# Altium PCB KP_Fedorov_SM5-71B — копия.PcbDoc
Units mm, origin at the board's own origin, x right, y up, seen from the top; angles counter-clockwise.
Board outline 50 x 50 mm, 2 copper layers (Top Layer, Bottom Layer), stack 1.56 mm thick; 70 components, 40 nets, 255 pads, 69 vias.
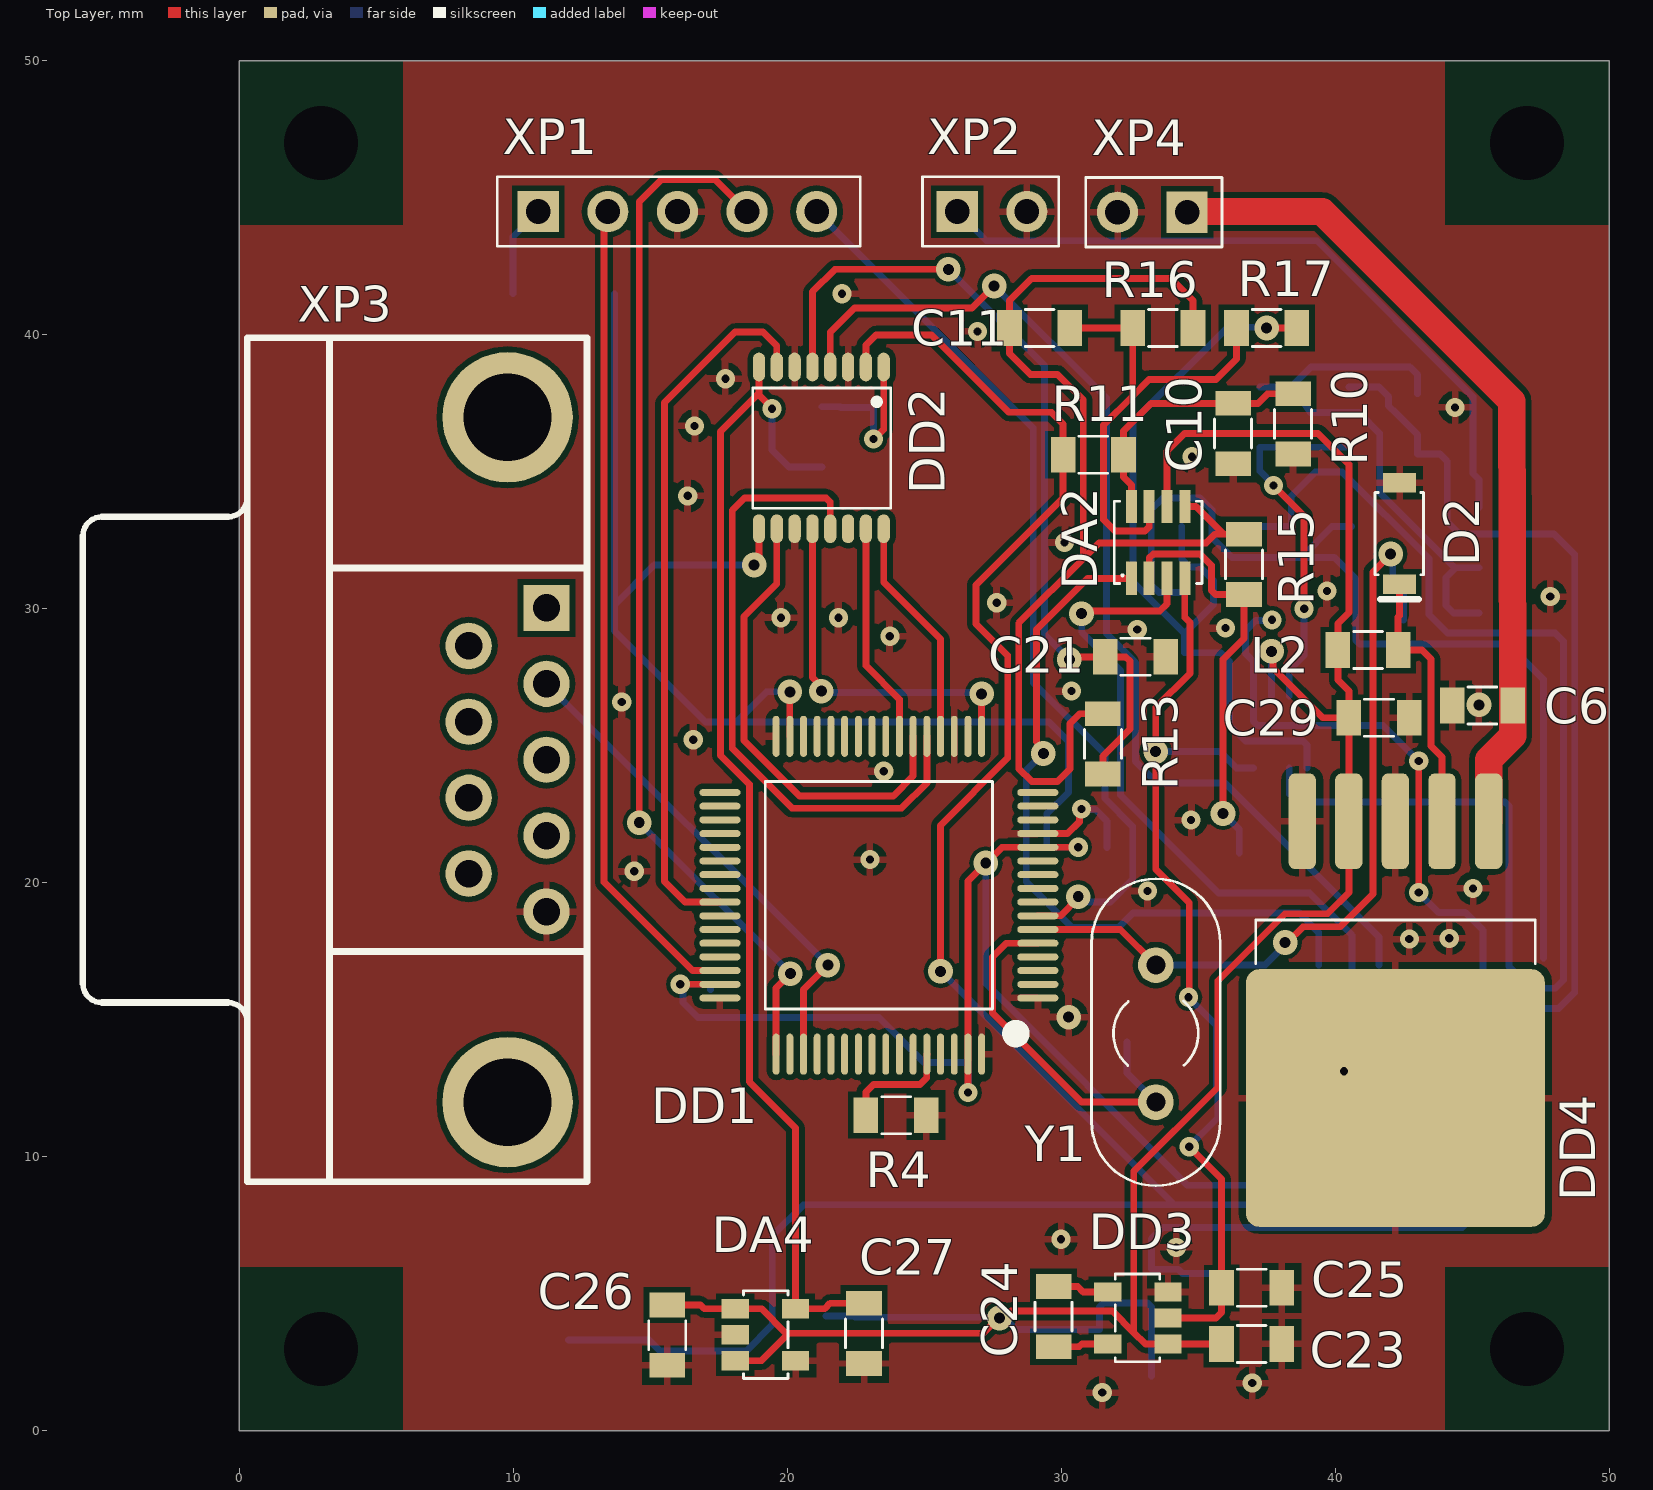
[diagram p0: Top Layer view]
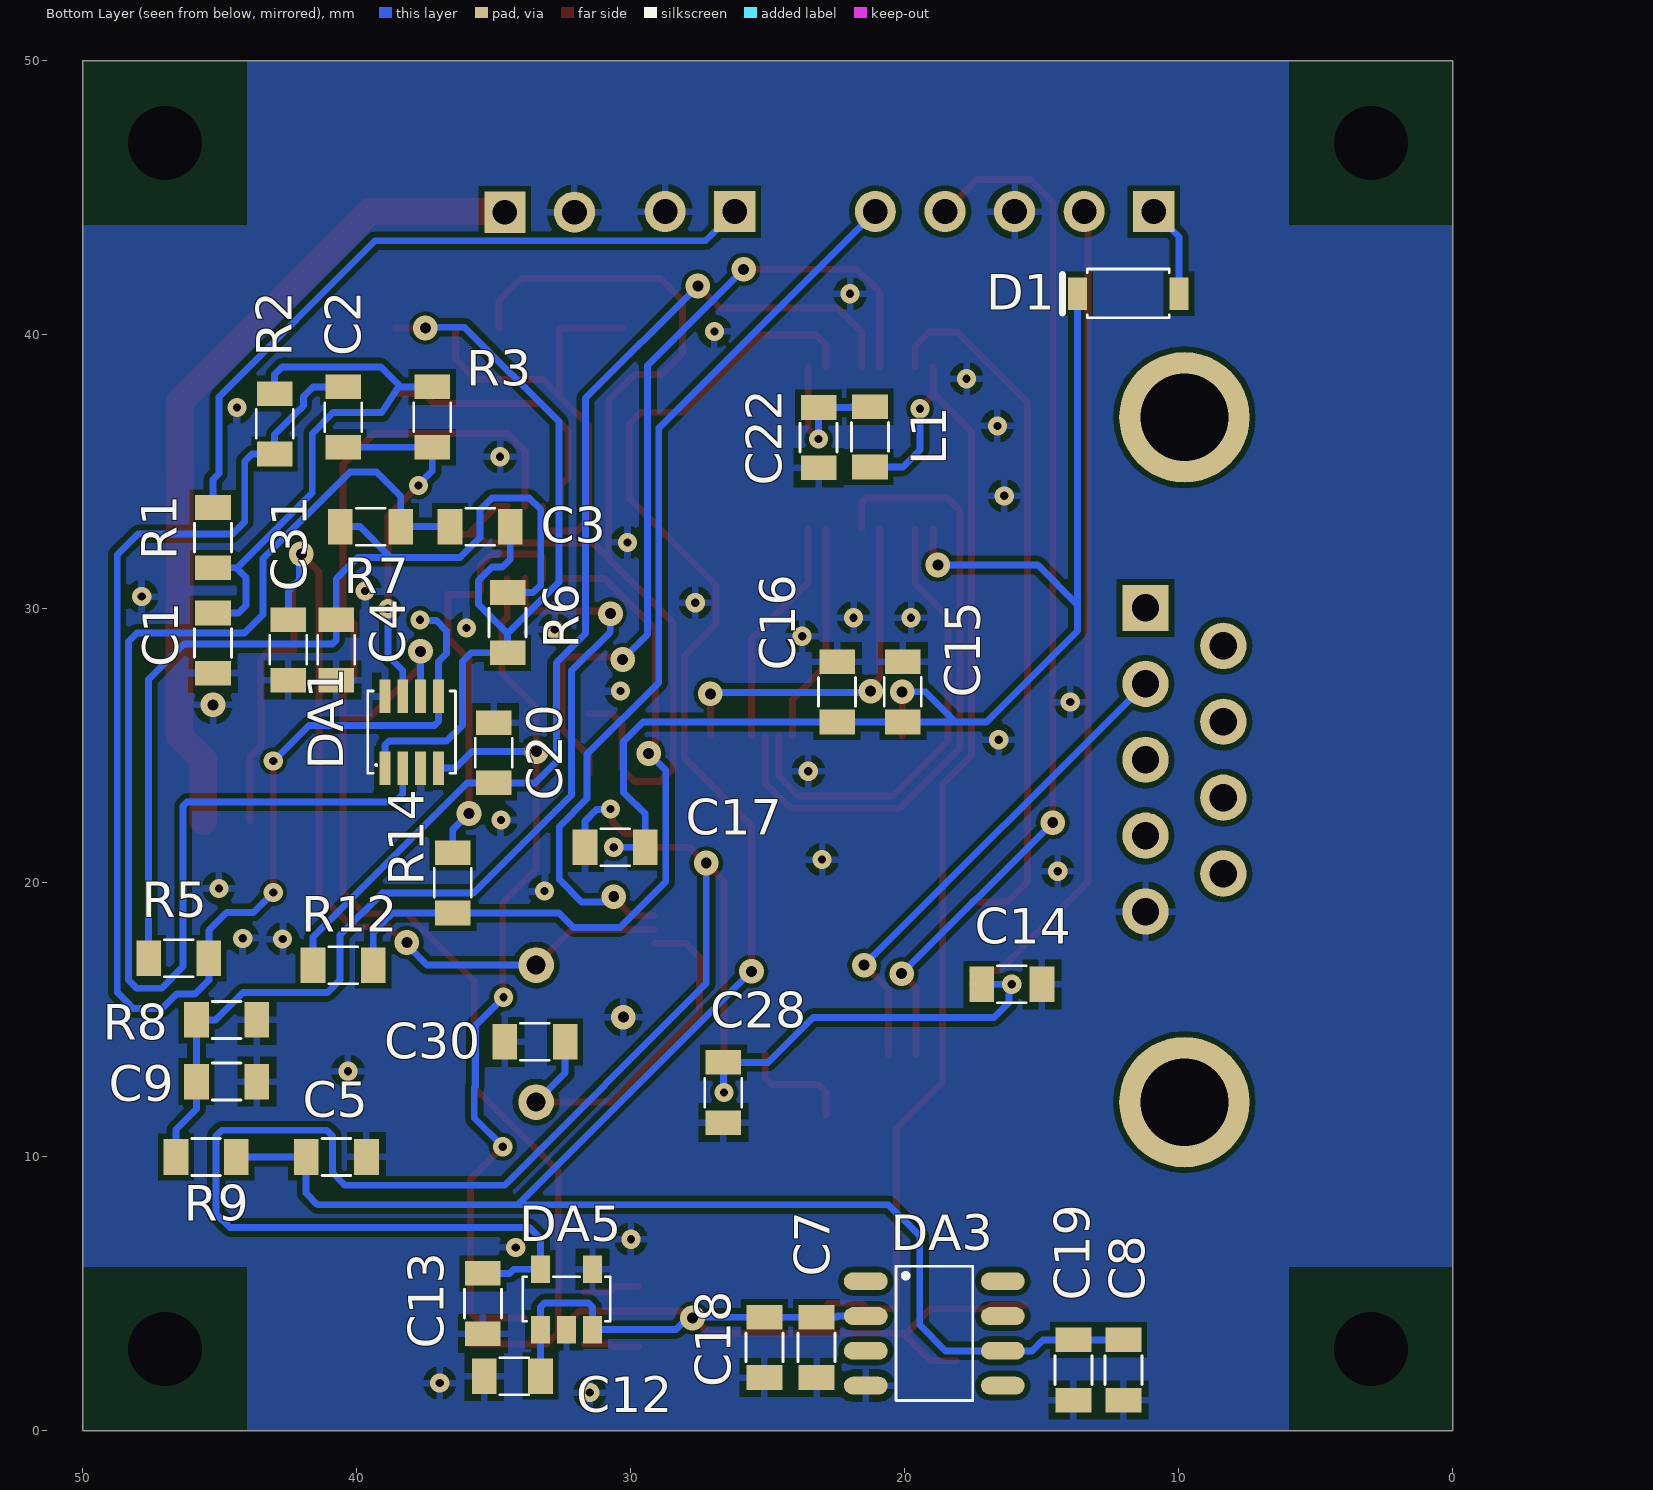
[diagram p1: Bottom Layer view, seen from below]

## Layer stack, top to bottom
Top Solder: solder mask 0.01, Solder Resist, Dk 3.5
Top Layer: signal copper 0.03
Dielectric 1: dielectric 1.5, FR-4, Dk 4.8
Bottom Layer: signal copper 0.03
Bottom Solder: solder mask 0.01, Solder Resist, Dk 3.5

## Board outline
0,0 50,0 50,50 0,50

## Design rules (kind name [scope] priority, off if disabled: settings)
AcuteAngle [All] p1: minimum=4.50000000000000E+0001 checktracksonly=FALSE
Clearance Clearance_KeepOutLayer [OnLayer('Keep-Out Layer')] p1: gap=0 ignorepadtopadclearanceinfootprint=FALSE
Clearance [All] p2: gap=0.15 ignorepadtopadclearanceinfootprint=FALSE except(0.2: Track-Fill Track-Poly Track-Region SMDPad-Fill SMDPad-Poly SMDPad-Region THPad-Fill THPad-Poly THPad-Region Fill-Fill Fill-Poly Fill-Region Poly-Poly Poly-Region Region-Region)
ComponentClearance [All] p1: gap=0.2 collisioncheckmode=3 verticalgap=0.2 showdistances=FALSE
DiffPairsRouting DiffPairsRouting_USB [InDifferentialPair('USB0') or InDifferentialPair('USB1')] p1: maxlimit=0.254 minlimit=0.15 mostfreqgap=0.15 toplayer_minwidth=0.15 toplayer_maxwidth=0.15 toplayer_prefwidth=0.15 bottomlayer_minwidth=0.15 bottomlayer_maxwidth=0.15 bottomlayer_prefwidth=0.15 maxuncoupledlength=12.7
HoleSize [All] p1: absolutevalues=TRUE maxlimit=3.2 minlimit=0.3 maxpercent=80.000 minpercent=20.000
HoleToHoleClearance [All] p1: gap=0.3 allowstackedmicrovias=TRUE
MatchedLengths [InDifferentialPair('USB0') or InDifferentialPair('USB1')] p1: tolerance=1.905 checknetsindiffpair=TRUE checkdiffpairvsdiffpair=FALSE checkxsignals=FALSE checkothers=FALSE
MinimumAnnularRing [All] p1: minimumring=0.2
MinimumSolderMaskSliver [All] p1: minsoldermaskwidth=0.1
PolygonConnect PolygonConnect_Via [IsVia] p1: thpad.connectstyle=Direct thpad.reliefconductorwidth=0.254 thpad.reliefentries=4 thpad.polygonreliefangle="90 Angle" thpad.airgapwidth=0.254 smdpad.connectstyle=Relief smdpad.reliefconductorwidth=0.254 smdpad.reliefentries=4 smdpad.polygonreliefangle="90 Angle" smdpad.airgapwidth=0.254 via.connectstyle=Relief via.reliefconductorwidth=0.254 via.reliefentries=4 via.polygonreliefangle="90 Angle" via.airgapwidth=0.254
PolygonConnect [All] p2: connectstyle=Relief reliefconductorwidth=0.254 reliefentries=4 polygonreliefangle="90 Angle" airgapwidth=0.254
RoutingVias [All] p1: holewidth=0.4 width=0.9 viastyle="Through Hole" minholewidth=0.3 minwidth=0.7 maxholewidth=0.5 maxwidth=1.1
SMDEntry [All] p1: side=TRUE corner=TRUE anyangle=FALSE
SMDNeckDown [All] p1: percent=100.000
SMDToCorner [All] p1: distance=0
SMDToPlane [All] p1: distance=0
SilkToSilkClearance [All] p1: silktosilkclearance=0
SilkToSolderMaskClearance [IsPad] p1: minsilkscreentomaskgap=0 clearancetoexposedcopper=FALSE
SolderMaskExpansion [All] p1: expansion=0.05 istentingtop=FALSE
Width [All] p1: maxlimit=5 minlimit=0.15 preferedwidth=0.254 minimp=50.000000 maximp=50.000000 favimp=50.000000
23 further rules are at their usual default settings.

## Classes and differential pairs
component class KP_Fedorov_SM5-71B: C1 C2 C3 C4 C5 C6 C7 C8 C9 C10 C11 C12 C13 C14 C15 C16 C17 C18 C19 C20 C21 C22 C23 C24 C25 C26 C27 C28 C29 C30 C31 D1 D2 DA1 DA2 DA3 DA4 DA5 DD1 DD2 DD3 DD4 L1 L2 R1 R2 R3 R4 R5 R6 R7 R8 R9 R10 R11 R12 R13 R14 R15 R16 R17 XP1 XP2 XP3 XP4 Y1

## Components (designator, comment, footprint, x,y, rotation, side; value= is the part's Value field where it differs from the comment)
C1 "24nF" "0805 Capicator"#1 45.25,28.75 r270 bottom value=24n
C2 "10nF" "0805 Capicator"#1 40.5,37 r90 bottom value=10n
C3 "10n" "0805 Capicator"#1 35.5,33 r180 bottom
C4 "150n" "0805 Capicator"#1 40.75,28.5 r90 bottom
C5 "100 uF" "0805 Capicator"#1 40.75,10 r180 bottom
C6 "100 uF" "0805 Capicator"#1 45.375,26.475 r180 top
C7 "100 uF" "0805 Capicator"#1 23.225,3.05 r270 bottom
C8 "100 uF" "0805 Capicator"#1 12.025,2.225 r90 bottom
C9 "0.1 nF" "0805 Capicator"#1 44.75,12.75 r0 bottom
C10 "0.1 nF" "0805 Capicator"#1 36.275,36.4 r90 top
C11 "0.1 nF" "0805 Capicator"#1 29.214,40.25 r180 top
C12 "0.1 uF" "0805 Capicator"#2 34.25,2 r0 bottom
C13 "0.1 uF" "0805 Capicator"#1 35.4,4.65 r270 bottom
C14 "0.1uF" "0805 Capicator"#1 16.1,16.3 r180 bottom
C15 "0.1uF" "0805 Capicator"#1 20.075,26.975 r90 bottom
C16 "0.1uF" "0805 Capicator"#1 22.475,26.975 r90 bottom
C17 "0.1uF" "0805 Capicator"#1 30.575,21.3 r0 bottom
C18 "0.1 uF" "0805 Capicator"#1 25.125,3.05 r270 bottom
C19 "0.1 uF" "0805 Capicator"#1 13.85,2.225 r90 bottom
C20 "2.2 nF" "0805 Capicator"#1 35,24.75 r270 bottom
C21 "2.2 nF" "0805 Capicator"#1 32.714,28.25 r0 top
C22 "1 uF" "0805 Capicator"#1 23.15,36.25 r90 bottom
C23 "1 uF" "0805 Capicator"#1 36.95,3.175 r0 top
C24 "1 uF" "0805 Capicator"#1 29.725,4.175 r90 top
C25 "1 uF" "0805 Capicator"#1 36.95,5.225 r0 top
C26 "4.7 uF" "0805 Capicator"#1 15.625,3.5 r270 top
C27 "4.7 uF" "0805 Capicator"#1 22.808,3.563 r270 top
C28 "4.7uF" "0805 Capicator"#1 26.625,12.35 r270 bottom
C29 "330 uF" "0805 Capicator"#1 41.6,26.025 r0 top
C30 "10 pF" "0805 Capicator"#1 33.5,14.2 r0 bottom
C31 "10 pF" "0805 Capicator"#1 42.5,28.5 r270 bottom
D1 "MBR0520LT1G" sod-123 10,41.5 r0 bottom
D2 "MBR0520LT1G" sod-123 42.35,34.6 r270 top
DA1 "AD8502" SOT-23-8#1 38,25.5 r180 bottom
DA2 "AD8502" SOT-23-8#2 33.539,32.425 r0 top
DA3 "LDO" SOIC-8 21.425,5.465 r180 bottom
DA4 "LDO2.5V" SOT-23-5 18.108,3.513 r270 top
DA5 "LDO3.3V" SOT-23-5 32.35,3.7 r180 bottom
DD1 "STM32F303RCT7" LQFP64 23.35,19.55 r180 top
DD2 "24bit 128k" TSSOP-16 23.525,38.825 r270 top
DD3 "DC/DC inv" SOT-23-5 33.9,4.125 r90 top
DD4 "DC/DC" TO-263-5L 42.2,22.25 r180 top
L1 "10 uH" "0805 Inductor" 21.275,36.275 r90 bottom
L2 "330 uH" "0805 Inductor" 41.2,28.5 r180 top
R1 "6.8k" "0805 Resistor" 45.25,32.6 r270 bottom
R2 "6.8k" "0805 Resistor" 43,36.75 r270 bottom
R3 "3.9k" "0805 Resistor" 37.25,37 r270 bottom
R4 "3.9k" "0805 Resistor" 23.975,11.525 r0 top
R5 "2.2k" "0805 Resistor" 46.5,17.25 r180 bottom
R6 "2.2k" "0805 Resistor" 34.5,29.5 r270 bottom
R7 "1.8k" "0805 Resistor" 39.5,33 r0 bottom
R8 "10k" "0805 Resistor" 44.75,15 r0 bottom
R9 "10k" "0805 Resistor" 45.5,10 r180 bottom
R10 "10k" "0805 Resistor" 38.464,36.75 r90 top
R11 "20k" "0805 Resistor" 31.175,35.625 r180 top
R12 "15k" "0805 Resistor" 40.5,17 r0 bottom
R13 "15k" "0805 Resistor" 31.525,25.075 r270 top
R14 "1k" "0805 Resistor" 36.5,20 r270 bottom
R15 "1k" "0805 Resistor" 36.675,31.625 r90 top
R16 "1k" "0805 Resistor" 33.714,40.25 r0 top
R17 "2k" "0805 Resistor" 37.5,40.25 r180 top
XP1 "PLS-5" "PBS 5x1" 10.92,44.5 r0 top
XP2 "PBS2" "PBS 2x1" 26.21,44.5 r0 top
XP3 "SCNM9FM2MBK" DB9 9.8,12 r90 top
XP4 "PBS2" "PBS 2x1" 34.6,44.475 r180 top
Y1 "8MHz" R38 33.458,14.5 r180 top
ZBOAS115392228 "Comment" "BOASVIEWdrill:Таблица отверстий:0:0:0:0" 3.9,2317.2 r0 top
ZBOAS298494460 "Слой 1" "BOASVIEWlayer:Top Layer:2:1:1:1" 50.4,2373.9 r0 top (schematic designator fewf)
ZBOAS883498437 "Comment" "BOASVIEWside:Вид платы слева:2:0:0:0" 199,2474.9 r0 top
ZBOAS1067394492 "Слой 2" "BOASVIEWlayer:Bottom Layer:2:-2:32:1" 245.7,2374.7 r180 top (schematic designator fewf)

## Footprints (in the part's own frame and the unit in brackets; to place one, negate y for a bottom-side part, rotate by r counter-clockwise, add the part's x,y. Pads: shape width x height; smd on the part's side, far side on the other; paste and mask are expansions set on the pad)
"0805 Capicator"#1 [mm]
  rect 0.9x1.3 smd: 1(-1.1,0) 2(1.1,0)
  silkscreen extent -0.53,-0.67 0.53,0.67, body extent -1.05,-0.67 1.05,0.68, height 0.75
"0805 Capicator"#2 [mm]
  rect 0.9x1.3 smd: 1(-0.95,0) 2(1.1,0)
  silkscreen extent -0.53,-0.67 0.52,0.67, body extent -1.05,-0.67 1.05,0.68, height 0.75
"0805 Inductor" [mm]
  rect 0.9x1.3 smd: 1(-1.1,0) 2(1.1,0)
  silkscreen extent -0.53,-0.67 0.52,0.67, body extent -1.05,-0.67 1.05,0.68, height 0.75
"0805 Resistor" [mm]
  rect 0.9x1.3 smd: 1(-1.1,0) 2(1.1,0)
  silkscreen extent -0.53,-0.67 0.52,0.67, body extent -1.05,-0.67 1.05,0.68, height 0.6
"BOASVIEWdrill:Таблица отверстий:0:0:0:0" [mm]
"BOASVIEWlayer:Bottom Layer:2:-2:32:1" [mm]
"BOASVIEWlayer:Top Layer:2:1:1:1" [mm]
"BOASVIEWside:Вид платы слева:2:0:0:0" [mm]
DB9 [mm]
  rect 1.69x1.69 hole 1: 1(18.035,-1.42)
  round 1.69 hole 1: 2(15.265,-1.42) 3(12.495,-1.42) 4(9.725,-1.42) 5(6.955,-1.42) 6(16.65,1.42) 7(13.88,1.42) 8(11.11,1.42) 9(8.34,1.42)
  round 4.76 hole 3.2: A(0,0) A(24.99,0)
  silkscreen extent -2.91,-2.9 27.9,15.5, body extent -2.97,-2.85 27.92,15.55, height 12.53
LQFP64 [mm]
  oval 1.5x0.254 smd paste+0 mask+0.02: 1(-5.8,3.75) 2(-5.8,3.25) 3(-5.8,2.75) 4(-5.8,2.25) 5(-5.8,1.75) 6(-5.8,1.25) 7(-5.8,0.75) 8(-5.8,0.25) 9(-5.8,-0.25) 10(-5.8,-0.75) 11(-5.8,-1.25) 12(-5.8,-1.75) 13(-5.8,-2.25) 14(-5.8,-2.75) 15(-5.8,-3.25) 16(-5.8,-3.75) 33(5.8,-3.75) 34(5.8,-3.25) 35(5.8,-2.75) 36(5.8,-2.25) 37(5.8,-1.75) 38(5.8,-1.25) 39(5.8,-0.75) 40(5.8,-0.25) 41(5.8,0.25) 42(5.8,0.75) 43(5.8,1.25) 44(5.8,1.75) 45(5.8,2.25) 46(5.8,2.75) 47(5.8,3.25) 48(5.8,3.75)
  oval 0.254x1.5 smd paste+0 mask+0.02: 17(-3.75,-5.8) 18(-3.25,-5.8) 19(-2.75,-5.8) 20(-2.25,-5.8) 21(-1.75,-5.8) 22(-1.25,-5.8) 23(-0.75,-5.8) 24(-0.25,-5.8) 25(0.25,-5.8) 26(0.75,-5.8) 27(1.25,-5.8) 28(1.75,-5.8) 29(2.25,-5.8) 30(2.75,-5.8) 31(3.25,-5.8) 32(3.75,-5.8) 49(3.75,5.8) 50(3.25,5.8) 51(2.75,5.8) 52(2.25,5.8) 53(1.75,5.8) 54(1.25,5.8) 55(0.75,5.8) 56(0.25,5.8) 57(-0.25,5.8) 58(-0.75,5.8) 59(-1.25,5.8) 60(-1.75,5.8) 61(-2.25,5.8) 62(-2.75,5.8) 63(-3.25,5.8) 64(-3.75,5.8)
  silkscreen extent -5.2,-4.15 4.15,5.25, body extent -6,-6.02 6,5.98, height 1.56
"PBS 2x1" [mm] "Connector; Header; 5 Position"
  rect 1.5x1.5 hole 0.9: 1(0,0)
  round 1.5 hole 0.9: 2(2.54,0)
  silkscreen extent -1.27,-1.27 3.7,1.27, body extent -1.34,-1.24 3.74,1.3, height 8.52
"PBS 5x1" [mm] "Connector; Header; 5 Position"
  rect 1.5x1.5 hole 0.9: 1(0,0)
  round 1.5 hole 0.9: 2(2.54,0) 3(5.08,0) 4(7.62,0) 5(10.16,0)
  silkscreen extent -1.5,-1.27 11.75,1.27, body extent -1.52,-1.25 11.68,1.25, height 8.5
R38 [mm] "Crystal"
  round 1.3 hole 0.7: 1(0,2.5) 2(0,-2.5)
  silkscreen extent -2.35,-5.65 2.35,5.55, body extent -2.26,-5.56 2.24,5.44, height 4
sod-123 [mm]
  rect 0.7x1.2 smd: 1(0,0) 2(3.7,0)
  silkscreen extent 0.35,-0.9 4.25,0.87, body extent 0,-0.8 3.7,0.8
SOIC-8 [mm]
  oval 1.6x0.65 smd: 1(0,0) 2(0,-1.27) 3(0,-2.54) 4(0,-3.81) 5(5,-3.81) 6(5,-2.54) 7(5,-1.27) 8(5,0)
  silkscreen extent 1.1,-4.35 3.9,0.55, body extent -0.36,-4.35 5.41,0.55, height 1.45
SOT-23-5 [mm]
  rect 0.7x1 smd mask+0.045: 1(-0.95,0) 2(0,0) 3(0.95,0) 4(0.95,2.2) 5(-0.95,2.2)
  silkscreen extent -1.6,0.3 1.6,1.92, body extent -1.5,-0.15 1.5,2.35, height 1.1
SOT-23-8#1 [mm]
  rect 0.4x1.22 smd: 1(-0.975,-1.31) 2(-0.325,-1.31) 3(0.325,-1.31) 4(0.975,-1.31) 5(-0.975,1.31) 6(-0.325,1.31) 7(0.975,1.31) 8(0.325,1.31)
  silkscreen extent -1.6,-1.5 1.6,1.5, body extent -1.5,-1.42 1.5,1.42, height 1.2
SOT-23-8#2 [mm]
  rect 0.4x1.22 smd mask+0.045: 1(-0.975,-1.31) 2(-0.325,-1.31) 3(0.325,-1.31) 4(0.975,-1.31) 5(-0.975,1.31) 6(-0.325,1.31) 7(0.975,1.31) 8(0.325,1.31)
  silkscreen extent -1.6,-1.5 1.6,1.5, body extent -1.5,-1.42 1.5,1.42, height 1.2
TO-263-5L [mm]
  rrect50% 1x3.5 smd: 1(-3.4,0) 2(-1.7,0) 3(0,0) 4(1.7,0) 5(3.4,0)
  rrect10% 10.9x9.4 smd: 3(0,10.1)
  silkscreen extent -5.1,3.6 5.1,5.2, body extent -5,-1.29 5,14.38, height 4.83
TSSOP-16 [mm]
  oval 1.05x0.45 smd paste+0 mask+0.1: 1(0,0) 2(0,-0.65) 3(0,-1.3) 4(0,-1.95) 5(0,-2.6) 6(0,-3.25) 7(0,-3.9) 8(0,-4.55) 9(5.9,-4.55) 10(5.9,-3.9) 11(5.9,-3.25) 12(5.9,-2.6) 13(5.9,-1.95) 14(5.9,-1.3) 15(5.9,-0.65) 16(5.9,0)
  silkscreen extent 0.76,-4.78 5.16,0.25, body extent -0.25,-4.78 6.15,0.23

## Part data
C1 C2 C3 C4 C5 C6 C7 C8 C9 C10 C11 C12 C13 C14 C15 C16 C17 C18 C19 C20 C21 C22 C23 C24 C25 C26 C27 C28 C29 C30 C31: library part Capacitor, ValueType=Конденсатор
D1 D2: library part "Diode Schottky", link=https://www.chipdip.ru/product/mbr0520lt1
DA1 DA2: library part OpAmp, ref=chipdip.ru/product/ad8502arjz-reel7
DA3: "ADR445BRZ"
DA4: "ADM7160AUJZ"
DA5: "TPS78233DDCR"
DD1: "ARM Cortex-M4 32-bit MCU, 256 KB Flash, 40 KB Internal RAM, 52 I/Os, 64-pin LQFP, -40 to 105 degC, Tray, 39x12bit ADC", Manufacturer=STMicroelectronics, ComponentLink2Description=Datasheet, ComponentLink2URL=http://www.st.com/st-web-ui/static/active/en/resource/technical/document/datasheet/DM00058181.pdf, ComponentLink3Description=ChipDip, ComponentLink3URL=https://www.chipdip.ru/product1/8001934304?from=suggest_product, Part Number=STM32F303RCT7, Type=IC
DD2: library part ADC, "AD7767"
DD3: "TPS60403DBVR"
DD4: "LM2575S-5.0/NOPB"
L1 L2: library part Inductor, ValueType=Индуктивность
R1 R2 R3 R4 R5 R6 R7 R8 R9 R10 R11 R12 R13 R14 R15 R16 R17: library part Resistor, ValueType=Резистор
XP1: library part Conn5x1, Manufacturer=Amass, ComponentLink1URL=chipdip.ru/product/pls-5, Part Number=PLS-5, Type=Connector
XP2 XP4: library part Conn2x1, Type=Connector
XP3: library part Conn9x1, "DB-9M", Manufacturer=Amass, Part Number=XT30PW, ComponentLink1Description=AliExpress, ComponentLink1URL=https://www.chipdip.ru/product/scnm9fm2mbk, Type=Connector
Y1: library part "Crystal 8MHz", "Crystal. HC-49S (US)", Manufacturer=China, Part Number=8.000MHzHC-49US, ComponentLink1Description=Chip&Dip, ComponentLink1URL=https://www.chipdip.ru/product/8mhz-hc-49s, Type=Crystal

## Free pads (board coordinates)
  round 0 hole 2.7 unplated mask+1: 0(3,3) 0(3,47) 0(47,3) 0(47,47)

## Via types
v1: diameter 0.7, hole 0.3, Top Layer to Bottom Layer, 45 vias
v2: diameter 0.9, hole 0.4, Top Layer to Bottom Layer, 24 vias

## Nets (pads, with @x,y where several pads share a name; then routed paths per layer and width w, separated by ;. In a path a pad name is that pad's centre, name@x,y a point inside that pad or via, vN(x,y) a via of type N, cw(c..) or ccw(c..) an arc to the next point about the centre after c; other vN are vias at no path point)
+2.5V: C27.1 DA4.5 DD2.8 L1.1 | length 43
  Top Layer w0.25: DD2.8 18.975,37.873 ; v1(19.45,37.3) 19.45,37.325 18.975,37.8 18.975,37.873 ; C27.1 21.575,4.663 21.375,4.463 DA4.5 20.308,11.061 18.625,12.744 18.625,23.6 17.575,24.65 17.575,36.473 18.975,37.873
  Bottom Layer w0.25: v1(19.45,37.3) 19.45,35.8 20.075,35.175 L1.1
+3.3V: C13.1 C14.1 C15.1 C16.1 C17.1 C28.1 D1.2 DA5.5 DD1.12 DD1.31 DD1.47 DD1.63 DD2.9 | length 120.3
  Top Layer w0.25: v1(16.1,16.3) DD1.47 ; v2(18.8,31.6) 18.8,31.775 18.975,31.95 DD2.9 ; DD1.31 v2(20.1,26.975) ; v1(26.6,12.35) DD1.63 26.6,20.075 v2(27.25,20.725) 27.267,20.725 27.842,21.3 DD1.12 v1(30.625,21.3)
  Bottom Layer w0.25: D1.2 13.7,30.15 ; v1(16.1,16.3) C14.1 C14.1@17.2,16.104 ; v1@16.205,16.205 16.205,15.632 16.75,15.088 23.359,15.088 24.996,13.45 C28.1 26.625,12.375 v1(26.6,12.35) ; 17.008,25.893 13.7,29.201 13.7,30.15 ; 17.026,25.875 18.15,25.875 ; v2(18.8,31.6) 15.15,31.6 13.7,30.15 ; 19,25.875 18.15,25.875 ; 19.025,25.875 C15.1 20.725,25.875 C16.1 29.554,25.875 30.267,25.162 30.267,23.301 29.475,22.509 C17.1 v1(30.625,21.3) ; v2(20.1,26.975) 19.25,26.975 18.15,25.875 ; v2(27.25,20.725) 27.25,16.321 34.605,8.966 40.437,8.966 40.894,9.423 40.894,10.77 41.097,10.973 44.933,10.973 45.136,10.77 45.136,7.925 44.636,7.425 33.709,7.425 33.3,7.017 DA5.5 34.275,5.9 34.425,5.75 C13.1
+5V: C7.1 C12.1 C18.1 C23.1 C26.1 C29.1 DA1.8 DA2.8 DA3.2 DA4.1 DA4.3 DA5.1 DA5.3 DD3.1 DD4.4 L2.2 | length 90.5
  Top Layer w0.25: C26.1 16.838,4.6 16.975,4.463 DA4.1 19.069,4.463 19.968,3.565 27.143,3.565 27.703,4.125 27.926,4.125 28.176,4.375 31.874,4.375 32.65,3.599 ; DA4.3 19.069,2.563 20.019,3.513 ; DA2.8 33.864,35.764 34.498,36.398 39.377,36.398 40.5,35.275 40.5,29.869 40.1,29.469 L2.2 40.1,27.4 40.5,27 C29.1 ; C23.1 DD3.1 33.074,3.175 32.65,3.599 ; v2(37.675,28.45) 37.687,28.45 37.733,28.404 37.733,27.842 39.55,26.025 C29.1 ; 32.65,3.599 32.65,9.475 35.716,12.541 35.716,16.416 38.175,18.875 39.725,18.875 40.5,19.65 DD4.4 C29.1
  Bottom Layer w0.25: DA3.2 22.455,4.195 22.5,4.15 C7.1 27.725,4.15 v2(27.75,4.125) ; v2@27.926,4.125 28.351,3.7 DA5.3 31.4,4.526 31.549,4.675 33.151,4.675 33.3,4.526 DA5.1 C12.1 ; DA1.8 v2(37.675,28.45)
-5V: C25.1 DA1.4 DA2.4 DD3.2 | length 35.1
  Top Layer w0.25: DD3.2 35.65,4.125 35.85,4.325 C25.1 35.85,9.2 v1(34.675,10.375) ; DA2.4 34.514,29.686 34.698,29.502 34.698,27.645 33.452,26.399 v2(33.452,24.79) 33.452,20.501 34.675,19.278 34.675,15.85 v1(34.65,15.825)
  Bottom Layer w0.25: v2(33.452,24.79) 35.792,24.79 36.392,24.19 DA1.4 ; v1(34.65,15.825) 35.675,14.8 35.675,12.582 35.716,12.541 35.716,11.416 v1(34.675,10.375)
GND: C1.2 C4.1 C5.2 C6.2 C7.2 C8.1 C9.1 C10.1 C12.2 C13.2 C14.2 C15.2 C16.2 C17.2 C18.2 C19.1 C20.1 C21.2 C22.1 C23.2 C25.2 C26.2 C27.2 C28.2 C29.2 C30.2 C31.2 D2.1 DA1.3 DA1.5 DA3.4 DA4.2 DA4.4 DA5.2 DA5.4 DD1.1 DD1.13 DD1.19 DD1.32 DD1.48 DD1.64 DD2.3 DD2.6 DD2.11 DD3.3 DD4.3 DD4.5 R4.2 R8.1 R10.1 XP1.3 XP2.2 XP3.5 XP4.2 | length 4.3
  Top Layer w0.254: DD1.13 30.238,21.8 30.663,22.224 30.663,22.615 v1(30.748,22.7)
  Bottom Layer w0.254: v1(30.748,22.7) 30.772,22.676 31.249,22.676 31.675,22.25 C17.2
  other v1: 31.5,1.4 36.975,1.75 34.2,6.7 30,7 40.325,13.125 42.708,17.953 44.166,17.977 33.15,19.7 45.034,19.8 14.425,20.425 23.025,20.85 34.742,22.291 23.525,24.075 16.575,25.225 13.97,26.6 30.375,27 23.75,29 32.775,29.25 36,29.3 19.775,29.675 21.875,29.675 27.65,30.225 47.85,30.45 39.7,30.65 30.125,32.425 16.375,34.125 34.775,35.55 16.625,36.675 44.375,37.35 17.75,38.4 26.95,40.125 22,41.5
  other v2: 30.275,15.1 45.248,26.5
NetC1_1: C1.1 R1.2 R2.1 R3.1 | length 20.6
  Bottom Layer w0.25: R3.1 38.481,38.1 39.091,37.16 40.868,37.16 41.625,36.404 41.625,34.25 44.375,31.5 ; 38.397,38.1 39.122,38.825 39.736,38.825 42.725,38.825 43,38.55 R2.1 ; C1.1 44.325,29.85 44.05,30.125 44.05,31.15 44.4,31.5 45.05,31.5 R1.2
NetC2_1: C2.1 DA1.6 R3.2 | length 13.2
  Top Layer w0.25: v1(37.75,34.5) 38.869,33.381 v1(38.869,30.006)
  Bottom Layer w0.25: v1(37.75,34.5) 37.75,34.525 37.25,35.025 R3.2 C2.1 ; DA1.6 38.325,27.75 38.869,28.294 v1(38.869,30.006)
NetC2_2: C2.2 DA1.7 R2.2 R5.2 | length 53.4
  Top Layer w0.25: v1(43.05,19.65) v1(43.05,24.45)
  Bottom Layer w0.25: v1(37.7,29.6) 37.675,29.575 37.1,29.575 36.725,29.2 36.725,28.375 37.025,28.075 37.025,25.896 37.171,25.75 41.75,25.75 v1(43.05,24.45) ; C2.2 41.6,38.1 41.95,37.75 41.95,37.411 42.236,37.125 43,36.361 R2.2 43.827,35.65 44.089,35.388 44.089,33.186 44.54,32.735 47.986,32.735 48.743,31.979 48.743,16.002 48.158,15.418 47.117,15.418 46.584,15.951 45.908,15.951 45.4,16.459 R5.2 45.4,18.275 44.75,18.925 43.775,18.925 v1(43.05,19.65)
NetC3_1: C3.1 DA1.2 R7.1 | length 46.8
  Bottom Layer w0.25: C3.1 R7.1 38.4,34.125 39.275,35 40.258,35 43.425,31.833 43.425,29.8 44.102,29.123 48.031,29.123 48.336,28.818 48.336,16.459 48.031,16.154 47.13,16.154 46.34,16.945 46.34,22.804 46.193,22.95 38.625,22.95 38.325,23.25 DA1.2
NetC3_2: C3.2 DA1.1 R6.2 R17.1 | length 29.7
  Top Layer w0.254: v2(37.5,40.25) R17.1
  Bottom Layer w0.25: C3.2 34.4,31.82 34.691,31.528 35.06,31.528 35.558,31.031 35.558,30.158 34.5,29.1 ; v2(37.5,40.25) 37.475,40.275 36.063,40.275 32.625,36.837 32.625,30.975 33.094,30.506 34.031,29.569 34.5,29.1 ; DA1.1 38.975,25.029 38.829,25.175 36.725,25.175 36.15,25.75 36.15,28.075 35.825,28.4 R6.2 34.5,29.1
NetC4_2: C4.2 R5.1 R6.1 R7.2 | length 35.7
  Bottom Layer w0.25: R6.1 33.566,30.6 33.289,30.877 33.289,33.619 33.72,34.05 35.066,34.05 35.5,33.616 35.5,32.611 36.236,31.875 38.764,31.875 ; R7.2 39.889,33 38.764,31.875 ; R5.1 47.6,27.432 46.313,28.719 40.896,28.719 40.75,28.865 40.75,31.1 39.975,31.875 38.764,31.875
NetC6_1: C6.1 DD4.1 XP4.1 | length 30.4
  Top Layer w1: XP4.1@34.6,44.5 39.525,44.5 46.45,37.575 46.475,27.775 C6.1 46.475,25.375 45.6,24.5 DD4.1
NetC9_2: C9.2 DA2.3 R8.2 R9.1 | length 34.8
  Top Layer w0.25: v2(30.746,29.825) 30.842,29.921 33.599,29.921 33.864,30.186 DA2.3
  Bottom Layer w0.25: v2(30.746,29.825) 30.751,29.82 30.751,29.164 32.164,27.75 32.164,23.211 35.741,19.634 39.073,19.634 40.615,18.092 40.615,16.459 41.072,16.002 44.159,16.002 45.161,15 R8.2 C9.2 45.85,11.748 46.6,10.998 R9.1
NetC10_2: C10.2 DA2.5 R10.2 R11.1 | length 9.6
  Top Layer w0.25: DA2.5 32.564,34.519 32.275,34.808 R11.1 32.275,36.487 33.288,37.5 C10.2 37.186,37.5 37.536,37.85 R10.2
NetC11_1: C11.1 DA2.6 R16.1 R17.2 | length 17.9
  Top Layer w0.25: C11.1 R16.1 32.614,37.776 ; DA2.6 33.214,32.991 33.065,32.842 31.958,32.842 31.547,33.253 31.547,36.709 32.614,37.776 ; R17.2 36.4,39.125 35.65,38.375 33.213,38.375 32.614,37.776
NetC11_2: C11.2 DA2.7 R13.1 R15.2 R16.2 | length 41.4
  Top Layer w0.25: 30.81,32.356 30.81,31.835 ; 30.81,32.41 30.81,37.617 29.87,38.557 28.876,38.557 28.114,39.319 C11.2 28.114,41.25 28.927,42.062 34.001,42.062 34.814,41.25 R16.2 ; R13.1 30.683,26.175 30.325,25.817 30.325,24.159 29.87,23.704 28.929,23.704 28.452,24.181 28.452,29.477 30.81,31.835 ; DA2.7 34.915,33.735 35.925,32.725 ; R15.2 35.925,32.725 ; 30.81,31.835 31.385,32.41 35.294,32.41 35.609,32.725 35.925,32.725
NetC20_2: C20.2 DD2.4 R12.2 | length 40
  Top Layer w0.25: DD2.4 21.575,40.093 22.457,40.975 26.751,40.975 v2(27.559,41.783)
  Bottom Layer w0.25: v2(27.559,41.783) 31.65,37.692 31.65,29.1 32.715,28.035 32.715,24.426 33.491,23.65 C20.2 35.975,23.65 41.6,18.025 R12.2
NetC21_1: C21.1 DD2.5 R13.2 | length 31
  Top Layer w0.25: DD2.5 20.925,41.575 21.742,42.393 v2(25.883,42.393) ; v2(30.3,28.15) 30.4,28.25 C21.1 32.358,28.25 32.512,28.096 32.512,25.612 31.525,24.625 R13.2
  Bottom Layer w0.25: v2(25.883,42.393) 29.388,38.887 29.388,29.062 v2(30.3,28.15)
NetC22_2: C22.2 DD2.1 L1.2 | length 5.8
  Top Layer w0.25: v1(23.15,36.2) 23.175,36.2 23.525,36.55 DD2.1
  Bottom Layer w0.25: L1.2 21.925,37.375 21.95,37.35 C22.2 C22.2@23.15,36.9 ; v1(23.15,36.2) 23.15,36.9
NetC24_1: C24.1 DD3.5 | length 2
  Top Layer w0.25: C24.1 30.658,3.075 30.758,3.175 DD3.5
NetC24_2: C24.2 DD3.4 | length 2.1
  Top Layer w0.25: C24.2 30.607,5.275 30.807,5.075 DD3.4
NetC30_1: C30.1 DD1.5 Y1.1 | length 13.8
  Top Layer w0.25: DD1.5 28,17.8 27.5,17.3 27.5,15.25 30.75,12 33,12 Y1.1
  Bottom Layer w0.25: C30.1 32.4,13.058 Y1.1
NetC31_1: C31.1 DD1.6 Y1.2 | length 29.2
  Top Layer w0.25: DD1.6 32.158,18.3 Y1.2 ; v2(38.175,17.825) 38.246,17.825 38.821,18.4 40.175,18.4 41.375,19.6 41.375,31.35 v2(42.025,32)
  Bottom Layer w0.25: Y1.2 37.447,17 38.175,17.728 v2(38.175,17.825) ; v2(42.025,32) 42.1,31.925 42.1,31.05 42.5,30.65 C31.1
NetD1_1: D1.1 XP1.1 | length 3.4
  Bottom Layer w0.25: D1.1 10,43.58 XP1.1
NetD2_2: D2.2 DD4.2 L2.1 | length 9.8
  Top Layer w0.25: D2.2 42.35,29.75 42.3,29.7 L2.1 43.175,28.5 43.5,28.175 43.5,25 43.9,24.6 DD4.2
NetDA2_1: DA2.1 R12.1 R14.2 | length 26.9
  Top Layer w0.25: v2(29.35,24.725) 29.35,24.901 29.1,25.151 29.1,29.25 30.965,31.115 DA2.1
  Bottom Layer w0.25: v2(29.35,24.725) 28.727,24.102 28.727,20.043 30.395,18.376 32.096,18.376 32.62,18.9 R14.2 38.698,18.9 39.4,18.198 R12.1
NetDA2_2: DA2.2 R14.1 R15.1 | length 15.4
  Top Layer w0.25: DA2.2 33.214,31.853 33.363,32.002 35.073,32.002 35.484,31.591 35.484,30.674 35.633,30.525 R15.1 36.675,28.925 35.91,28.16 v2(35.91,22.534)
  Bottom Layer w0.254: v2(35.91,22.534) 36.5,21.944 R14.1
NetDD1_17: DD1.17 DD2.12 | length 13.5
  Top Layer w0.25: DD2.12 20.925,27.501 21.25,27.176 v2(21.25,27) ; DD1.17@27.101,25.351 v2(27.101,26.901)
  Bottom Layer w0.25: v2(21.25,27) 21.3,26.95 27.051,26.95 v2(27.101,26.901)
NetDD1_20: DD1.20 DD2.16 | length 8.4
  Top Layer w0.25: DD2.16 23.525,30.975 25.599,28.901 DD1.20@25.599,25.351
NetDD1_21: DD1.21 DD2.13 | length 23.6
  Top Layer w0.25: DD2.13 21.575,33.904 21.429,34.05 18.45,34.05 18,33.6 18,24.9 20.175,22.725 24.175,22.725 25.1,23.65 DD1.21
NetDD1_22: DD1.22 DD2.10 | length 17
  Top Layer w0.25: DD2.10 19.625,30.925 18.425,29.725 18.425,25.2 20.45,23.175 23.875,23.175 24.6,23.9 DD1.22
NetDD1_23: DD1.23 DD2.15 | length 8.1
  Top Layer w0.25: DD2.15 22.875,27.925 24.099,26.701 DD1.23@24.099,25.351
NetDD1_41: DD1.41 DD2.7 | length 26
  Top Layer w0.25: DD1.41 16.275,19.3 15.525,20.05 15.525,37.525 18.1,40.1 19.125,40.1 19.625,39.6 DD2.7
NetDD1_60: DD1.60 R4.1 | length 4.1
  Top Layer w0.25: R4.1 22.875,12.375 23.15,12.65 24.85,12.65 25.099,12.899 DD1.60
NetR1_1: R1.1 XP2.1 | length 25.8
  Bottom Layer w0.25: XP2.1 27.276,43.434 39.341,43.434 45.034,37.741 45.034,34.941 45.25,34.725 R1.1
NRST: DD1.7 XP1.5 | length 33.4
  Top Layer w0.25: DD1.7@29.151,18.801 29.982,18.801 30.625,19.444 v2(30.625,19.5)
  Bottom Layer w0.25: XP1.5 28.981,36.599 28.981,27.319 31.598,24.702 31.598,23.077 32.614,22.061 32.614,20.117 31.801,19.304 30.997,19.304 30.801,19.5 v2(30.625,19.5)
SWCLK: DD1.49 XP1.4 | length 38.4
  Top Layer w0.25: v2(14.605,22.2) 14.605,44.855 15.419,45.669 17.371,45.669 XP1.4 ; DD1.49 19.6,16.171 v2(20.117,16.688)
  Bottom Layer w0.25: v2(14.605,22.2) v2(20.117,16.688)
SWDIO: DD1.46 XP1.2 | length 30.1
  Top Layer w0.25: XP1.2 13.325,44.365 13.325,20.025 16.55,16.8 DD1.46
UART_TX: DD1.51 XP3.2 | length 18.1
  Top Layer w0.25: DD1.51 20.6,16.108 v2(21.488,16.997)
  Bottom Layer w0.25: XP3.2 v2(21.488,16.997)
Vref: C5.1 C8.2 C19.2 DA3.6 DD2.2 R9.2 R11.2 | length 82.5
  Top Layer w0.25: DD2.2 22.875,39.625 23.25,40 25.275,40 28.1,37.175 29.65,37.175 30.075,36.75 R11.2 30.075,34.05 26.9,30.875 26.9,29.45 28.05,28.3 28.05,24.55 25.6,22.1 v2(25.6,16.775)
  Bottom Layer w0.25: C8.2 C19.2 14.969,3.325 15.369,2.925 DA3.6 18.521,2.925 19.456,3.861 19.456,7.112 20.599,8.255 34.145,8.255 ; v2(25.6,16.775) 25.625,16.775 34.145,8.255 ; R9.2 C5.1 41.85,8.678 41.427,8.255 34.145,8.255
pads on no net: DA3.1 DA3.3 DA3.5 DA3.7 DA3.8 DD1.2 DD1.3 DD1.4 DD1.8 DD1.9 DD1.10 DD1.11 DD1.14 DD1.15 DD1.16 DD1.18 DD1.24 DD1.25 DD1.26 DD1.27 DD1.28 DD1.29 DD1.30 DD1.33 DD1.34 DD1.35 DD1.36 DD1.37 DD1.38 DD1.39 DD1.40 DD1.42 DD1.43 DD1.44 DD1.45 DD1.50 DD1.52 DD1.53 DD1.54 DD1.55 DD1.56 DD1.57 DD1.58 DD1.59 DD1.61 DD1.62 DD2.14 XP3.1 XP3.3 XP3.4 XP3.6 XP3.7 XP3.8 XP3.9 XP3.A

## Polygon pours and split planes (outlines as drawn)
GND on Bottom Layer "Bottom Layer-GND" (solid, remove dead copper, pour order 9): 6,6 6,0 44,0 44,6 50,6 50,44 44,44 44,50 6,50 6,44 0,44 0,6
GND on Top Layer "Top Layer-GND" (solid, remove dead copper, pour order 8): 6,0 44,0 44,6 50,6 50,44 44,44 44,50 6,50 6,44 0,44 0,6 6,6

## Other copper
Top Layer:
  pour cut-out: 6.1,5.7

## Silkscreen, mask and mechanical layers (free items; w line width, h text height)
Mechanical 1:
  lines w0.25: 0,6 0,44 6,44 6,50 44,50 44,44 50,44 50,6 44,6 44,0 6,0 6,6 0,6
Mechanical 7:
  circle w0.254: c203.94,2423.534 r0.781
  circle w0.254: c197.16,2423.566 r0.781
  text "BOASFORMAT|А3|1|0|883070867|165354330|1000000000|2:1|" at -25.4,2514.6 h0
  text "DimH|-1244094|36388|89590552|984333691|3559054|2044262|2||||js12|False|False|False|False" at 202.16,2474.808 h0
  text "DimH|-1244094|42353|89590552|984327726|-4000001|3388809|2||||js12|False|True|False|False" at 202.16,2474.792 h0
  text "DimH|-1244094|136941|89590552|984233138|3440944|2105445|2||*||js12|False|False|False|False" at 202.16,2474.552 h0
  text "DimV|10|-39370088|29842511|983976378|-11692905|-37716535|2||||h12|True|False|False|False" at 50.4,2473.9 h0
  text "DimV|0|-34645670|32204725|981614174|-9685040|-31692914|2||||js12|False|True|False|False" at 56.4,2467.9 h0
  text "DimH|-34645670|0|66850395|946968504|-28307088|-10078740|2||||js12|False|True|False|False" at 144.4,2379.9 h0
  text "DimH|-39370078|0|69212599|944606300|-18307087|-11811024|2||||h12|True|False|False|False" at 150.4,2373.9 h0
  text "DimH|-39370098|0|69212609|944606290|-33976389|-12125975|2||||js12|False|True|False|False" at 150.4,2373.9 h0
  text "DimH|-39370078|78741|69212599|944527559|-17637796|-12322835|2||||js12|False|False|False|False" at 150.4,2373.7 h0
  text "1. * Размер для справок. / 2. Печатную плату изготовить комбинированнным позитивным методом. / 3. Печатная плата должна соответствовать ГОСТ 23752-79, группа жёсткости 3. Класс точности 4 по ГОСТ 23751-86. / 4. Материал-заменитель: FR-4. / 5. Шаг координатной сетки 0.5 мм. / 6. Ширина печатных проводников 0,25 мм и 1 мм. / 7. Допускается увеличение ширины печатного проводника и диаметра контактной площадки при обеспечении расстояния между ними и соседними элементами проводящего рисунка не / 8. Максимальное значение печатного проводника и размеров контактных площадок, позиционные допуски расположения осей отверстий, центров контактных площадок и элементов проводящего рисунка относительно друг друга, указанных в таблице и ГОСТ 23751-86, обеспечить инструментом. / 9. Остальные требования по ОСТ 4ГО.070.014." at 224.3,2296.3 h5
  text "SET2|Superlayer=MechanicalLayer7|Wsuperlayer=MechanicalLayer8|Layergrid=MechanicalLayer9|Werase=MechanicalLayer11|Layermark=MechanicalLayer12|Layerstamp=MechanicalLayer13|Thinline=0,18|Basicline=0,6|Gridline=0,18|Boardline=0,6|Contourpolygonline=0,6|PcbGridStep=1|PcbGridCleareanceAtView=0|PcbGridNumberEach=l5|PcbGridLineEach=l1|PcbGridCountSecondaryStrip=4|PcbGridEnabledStrip=False|PcbSignalGridEnabled=True|PcbSignalShowBukva=True|RealSignalLayerNames=False|PcbGridEnabledBothSide=False|PcbPolarGridEnabled=False|PcbPolarGridAngleStep=10|PcbPolarGridRadialStep=10|PcbPolarGridCenterPcbGrid=False|SilkShowPad=True|SilkViewName=Слой маркировки|SilkShowHole=True|SilkShowAxis=True|SilkShowBukva=True|SilkShowGrid=False|SolderShowGrid=False|SolderViewName=Слой маски|SolderShowAxis=False|SolderShowBukva=False|MainViewShowGrid=False|MainViewUseShapesDrill=False|ShowBukvaOnSboky=True|Density=2,2|TableName=Таблица 1|RazrezWidth=100|RealLayerNames=False|RazrezShowBukva=False|RazrezBukva=В-В|Sher=Rz 160|Asstoplayer=MechanicalLayer1|Asstoplayer2=None|Assbottomlayer=MechanicalLayer2|Assbottomlayer2=None|AssMinDiameterHoles=2|AssDim=False|AssMech=False|AssSilk=False|AssComponentSilk=False|AssFreeSilk=False|AssSmdPads=False|AssGridEnable=False|Mirror=Horisontal|PcbGridFontSize=3|PcbGridCenterZero=False|TTStampDistance=12|MainFontSize=5|PolyShtrihEnable=True|PolyStep=2,5|PcbDrillDrawingGridEnabled=False|PcbDrillDrawingViewName=Слой сверловки|PcbDrillDrawingShowBukva=False|PcbDrillDrawingShowAxis=False|PcbSignalLayersUseDrill=False|PcbSignalLayersUseShapesDrill=False|PcbSignalLayersShowAxis=True" at -25.4,-25.375 h0
  text "STAMP|Разработал|Федоров" at -25.4,-25.4 h0
  text "STAMP|Проверил|Глазков" at -25.4,-25.4 h0
  text "STAMP|Техконтроль|Глазков" at -25.4,-25.4 h0
  text "STAMP|Начальник отдела|" at -25.4,-25.4 h0
  text "STAMP|Нормоконтроль|Глазков" at -25.4,-25.4 h0
  text "STAMP|Утвердил|Глазков" at -25.4,-25.4 h0
  text "STAMP|Var|" at -25.4,-25.4 h0
  text "STAMP|Tech|Т.контр." at -25.4,-25.4 h0
  text "STAMP|Normo|Н.контр." at -25.4,-25.4 h0
  text "STAMP|Check|Пров." at -25.4,-25.4 h0
  text "STAMP|Design|Разраб." at -25.4,-25.4 h0
  text "STAMP|Utv|Утв." at -25.4,-25.4 h0
  text "STAMP|Обозначение|АБВГ.XXXXXX.XXX" at -25.4,-25.4 h0
  text "STAMP|Первичная применяемость|" at -25.4,-25.4 h0
  text "STAMP|Компания1|Группа СМ5-71б" at -25.4,-25.4 h0
  text "STAMP|Наименование1|" at -25.4,-25.4 h0
  text "STAMP|ТипДокумента|" at -25.4,-25.4 h0
  text "STAMP|Материал1|Стеклотекстолит" at -25.4,-25.4 h0
  text "STAMP|Материал2|СФ-2Н-35Г-1,5 ГОСТ 10316-78" at -25.4,-25.4 h0
  text "STAMP|Масса|" at -25.4,-25.4 h0
  text "STAMP|Lit|" at -25.4,-25.4 h0
  text "STAMP|Наименование2|Плата печатная" at -25.4,-25.4 h0
  text "STAMP|Компания2|МГТУ им. Н.Э. Баумана" at -25.4,-25.4 h0
  text "BOASVIADRILLTABLE:none,118110,45,|none,157480,24," at -25.4,-25.4 h0
  text "2BOASDRILLTABLE:none,275590,Да,2,True,|none,354331,Да,9,True,|none,393701,Да,9,True,|none,1062992,Нет,4,True,|none,1259843,Да,2,True," at -25.4,-25.4 h0
Mechanical 8:
  drawing of 20 lines, arcs and shapes, not listed
Mechanical 9:
  region: 20.7,2373.9 20.042,2378.9 20.7,2378.4 21.358,2378.9
  region: 20.7,2473.9 21.358,2468.9 20.7,2469.4 20.042,2468.9
  region: 150.4,2343.9 145.4,2343.242 145.9,2343.9 145.4,2344.558
  region: 50.4,2343.9 55.4,2344.558 54.9,2343.9 55.4,2343.242
  region: 202.16,2479.9 207.16,2480.558 206.66,2479.9 207.16,2479.242
  region: 199,2479.9 194,2479.242 194.5,2479.9 194,2480.558
  region: 31.8,2379.9 31.142,2384.9 31.8,2384.4 32.458,2384.9
  region: 31.8,2467.9 32.458,2462.9 31.8,2463.4 31.142,2462.9
  region: 56.4,2354.3 61.4,2354.958 60.9,2354.3 61.4,2353.642
  region: 144.4,2354.3 139.4,2353.642 139.9,2354.3 139.4,2354.958
  lines w0.18: 19.7,2373.9 50.4,2373.9 50.4,2342.9 ; 19.7,2473.9 50.4,2473.9 ; 20.7,2373.9 20.7,2473.9 ; 30.8,2379.9 56.4,2379.9 56.4,2353.3 ; 30.8,2467.9 56.4,2467.9 ; 31.8,2379.9 31.8,2467.9 ; 50.4,2343.9 150.4,2343.9 ; 56.4,2354.3 144.4,2354.3 ; 144.4,2353.3 144.4,2379.9 ; 150.4,2342.9 150.4,2373.9 ; 191,2479.9 224.025,2479.9 ; 199,2474.9 199,2480.9 ; 202.16,2474.552 202.16,2480.9
  text "1,5*" at 208.04,2482.43 h7.68
  text "50h12" at 18.17,2417.129 h7.68 r90
  text "44±0,125" at 29.27,2413.309 h7.68 r90
  text "44±0,125" at 89.809,2356.83 h7.68
  text "50h12" at 93.629,2346.43 h7.68
Mechanical 13:
  lines w0.18: 193.203,2426.855 198.9,2423.6 195.641,2421.729 ; 204.6,2227.6 269.6,2227.6 ; 204.6,2232.6 269.6,2232.6 ; 204.6,2237.6 269.6,2237.6 ; 204.6,2242.6 269.6,2242.6 ; 204.6,2247.6 269.6,2247.6 ; 204.6,2262.6 269.6,2262.6 ; 204.6,2267.6 269.6,2267.6 ; 204.6,2272.6 269.6,2272.6 ; 205.359,2425.371 202.1,2423.5 207.797,2420.245 ; 344.56,2242.6 344.56,2257.6 ; 349.58,2242.6 349.58,2257.6 ; 366.3,2496.7 369.4,2491.3 375,2501.1
  lines w0.6: -17.4,2247.6 -5.4,2247.6 ; -17.4,2282.6 -5.4,2282.6 ; -17.4,2307.6 -5.4,2307.6 ; -17.4,2332.6 -5.4,2332.6 ; -17.4,2449.6 -5.4,2449.6 ; -12.4,2222.6 -12.4,2367.6 ; -12.4,2389.6 -12.4,2509.6 ; -5.4,2367.6 -17.4,2367.6 -17.4,2222.6 -5.4,2222.6 ; -5.4,2389.6 -17.4,2389.6 -17.4,2509.6 -5.4,2509.6 ; -5.4,2495.6 64.6,2495.6 64.6,2509.6 ; 204.6,2222.6 204.6,2277.6 389.6,2277.6 ; 204.6,2252.6 269.6,2252.6 ; 204.6,2257.6 269.6,2257.6 ; 211.6,2252.6 211.6,2277.6 ; 221.6,2222.6 221.6,2277.6 ; 244.6,2222.6 244.6,2277.6 ; 259.6,2222.6 259.6,2277.6 ; 269.6,2222.6 269.6,2277.6 389.6,2277.6 ; 269.6,2237.6 339.6,2237.6 389.6,2237.6 ; 269.6,2262.6 389.6,2262.6 ; 318.6,2498.6 323.6,2489.6 331.2,2503.6 ; 331.3,2503.6 381.6,2503.6 ; 339.6,2222.6 339.6,2262.6 ; 339.6,2242.6 389.6,2242.6 ; 339.6,2257.6 354.6,2257.6 389.6,2257.6 ; 354.6,2242.6 354.6,2262.6 ; 360.17,2237.6 360.17,2242.6 ; 371.6,2242.6 371.6,2262.6 ; 389.6,2285.6 389.6,2277.6 ; -5.4,2222.6 389.6,2222.6 389.6,2509.6 -5.4,2509.6 ; -5.4,2222.6 -5.4,2509.6
  text "АБВГ.XXXXXX.XXX" at 53.871,2504.621 h7.68 r180
  text "Rz 160" at 331.3,2491.3 h10.75
  text "(" at 362.6,2491.3 h10.75
  text ")" at 373.6,2491.3 h10.75
  text "Перв. примен." at -13.485,2467.971 h5.38 r90
  text "Справ. №" at -13.485,2411.038 h5.38 r90
  text "Подп. и дата" at -13.485,2338.492 h5.38 r90
  text "Инв. № дубл." at -13.485,2309.035 h5.38 r90
  text "Взам. инв. №" at -13.485,2283.992 h5.38 r90
  text "АБВГ.XXXXXX.XXX" at 305.329,2268.079 h7.68
  text "Лит." at 343.527,2258.685 h5.38
  text "Масса" at 358.247,2258.685 h5.38
  text "Масштаб" at 372.77,2258.685 h5.38
  text "Подп. и дата" at -13.485,2253.992 h5.38 r90
  text "Изм." at 204.743,2253.685 h5.38
  text "Лист" at 212.402,2253.685 h5.38
  text "№ докум." at 225.538,2253.685 h5.38
  text "Подп." at 247.824,2253.685 h5.38
  text "Дата" at 259.846,2253.685 h5.38
  text "Разраб." at 205.133,2248.371 h5.38
  text "Федоров" at 222.28,2248.371 h5.38
  text "2:1" at 377.338,2248.079 h7.68
  text "Плата печатная" at 283.174,2247.579 h7.68
  text "Пров." at 205.133,2243.371 h5.38
  text "Глазков" at 222.28,2243.371 h5.38
  text "Т.контр." at 205.133,2238.371 h5.38
  text "Глазков" at 222.28,2238.371 h5.38
  text "Лист" at 341.042,2238.371 h5.38
  text "Листов" at 362.085,2238.371 h5.38
  text "1" at 382.015,2238.371 h5.38
  text "Стеклотекстолит" at 288.891,2231.685 h5.38
  text "Группа СМ5-71б" at 344.584,2231.079 h7.68
  text "Н.контр." at 205.133,2228.371 h5.38
  text "Глазков" at 222.28,2228.371 h5.38
  text "МГТУ им. Н.Э. Баумана" at 340.095,2225.387 h6.51
  text "СФ-2Н-35Г-1,5 ГОСТ 10316-78" at 278.661,2225.185 h5.38
  text "Инв. № подл." at -13.485,2224.035 h5.38 r90
  text "Утв." at 205.133,2223.371 h5.38
  text "Глазков" at 222.28,2223.371 h5.38
  text "Копировал" at 280.133,2218.371 h5.38
  text "Формат А3" at 359.682,2218.371 h5.38

## Text inside footprints (layer, text, board x,y; h text height)
ZBOAS115392228: Mechanical 12 "4,8" at 96.422,2245.419 h7.68; Mechanical 12 "Да" at 136.605,2245.419 h7.68; Mechanical 12 "3,2" at 57.252,2245.419 h7.68; Mechanical 12 "2" at 168.032,2245.419 h7.68; Mechanical 12 "-" at 99.107,2255.979 h7.68; Mechanical 12 "Нет" at 135.181,2255.979 h7.68; Mechanical 12 "2,7" at 57.136,2255.979 h7.68; Mechanical 12 "4" at 168.328,2255.979 h7.68; Mechanical 12 "1,7" at 97.18,2264.179 h7.68; Mechanical 12 "Да" at 136.605,2264.179 h7.68; Mechanical 12 "1" at 60.064,2264.179 h7.68; Mechanical 12 "9" at 168.238,2264.179 h7.68; Mechanical 12 "1,5" at 97.285,2272.179 h7.68; Mechanical 12 "Да" at 136.605,2272.179 h7.68; Mechanical 12 "0,9" at 57.447,2272.179 h7.68; Mechanical 12 "9" at 168.238,2272.179 h7.68; Mechanical 12 "1,3" at 97.3,2280.179 h7.68; Mechanical 12 "Да" at 136.605,2280.179 h7.68; Mechanical 12 "0,7" at 57.327,2280.179 h7.68; Mechanical 12 "2" at 168.032,2280.179 h7.68; Mechanical 12 "0,9" at 96.681,2288.179 h7.68; Mechanical 12 "переходное" at 12.36,2288.179 h7.68; Mechanical 12 "Да" at 136.605,2288.179 h7.68; Mechanical 12 "0,4" at 57.608,2288.179 h7.68; Mechanical 12 "24" at 166.779,2288.179 h7.68; Mechanical 12 "0,7" at 96.561,2296.179 h7.68; Mechanical 12 "переходное" at 12.36,2296.179 h7.68; Mechanical 12 "Да" at 136.605,2296.179 h7.68; Mechanical 12 "0,3" at 57.447,2296.179 h7.68; Mechanical 12 "45" at 166.536,2296.179 h7.68; Mechanical 12 "отв." at 164.774,2303.929 h7.68; Mechanical 12 "Кол." at 164.86,2311.429 h7.68; Mechanical 12 "металлизации" at 121.868,2303.929 h7.68; Mechanical 12 "Наличие" at 129.756,2311.429 h7.68; Mechanical 12 "площадки, мм" at 82.847,2303.929 h7.68; Mechanical 12 "Диаметр конт." at 81.4,2311.429 h7.68; Mechanical 12 "мм" at 57.65,2303.929 h7.68; Mechanical 12 "Диаметр отв.," at 42.905,2311.429 h7.68; Mechanical 12 "отв." at 18.12,2303.929 h7.68; Mechanical 12 "Обозначение" at 7.289,2311.429 h7.68; Mechanical 12 "Таблица 1" at 3.9,2318.7 h7.68
ZBOAS298494460: Mechanical 7 "50" at 148.684,2367 h4.61; Mechanical 7 "45" at 138.589,2367 h4.61; Mechanical 7 "40" at 128.643,2367 h4.61; Mechanical 7 "35" at 118.628,2367 h4.61; Mechanical 7 "30" at 108.682,2367 h4.61; Mechanical 7 "25" at 98.63,2367 h4.61; Mechanical 7 "20" at 88.684,2367 h4.61; Mechanical 7 "15" at 79.116,2367 h4.61; Mechanical 7 "10" at 69.17,2367 h4.61; Mechanical 7 "5" at 59.478,2367 h4.61; Mechanical 7 "0" at 49.647,2367 h4.61; Mechanical 7 "50" at 42.968,2472.688 h4.61; Mechanical 7 "45" at 42.779,2462.688 h4.61; Mechanical 7 "40" at 42.887,2452.688 h4.61; Mechanical 7 "35" at 42.855,2442.688 h4.61; Mechanical 7 "30" at 42.963,2432.688 h4.61; Mechanical 7 "25" at 42.86,2422.688 h4.61; Mechanical 7 "20" at 42.968,2412.688 h4.61; Mechanical 7 "15" at 43.831,2402.688 h4.61; Mechanical 7 "10" at 43.939,2392.688 h4.61; Mechanical 7 "5" at 44.556,2382.688 h4.61; Mechanical 7 "0" at 44.893,2372.688 h4.61
ZBOAS1067394492: Mechanical 7 "50" at 243.984,2367.8 h4.61; Mechanical 7 "45" at 253.889,2367.8 h4.61; Mechanical 7 "40" at 263.943,2367.8 h4.61; Mechanical 7 "35" at 273.928,2367.8 h4.61; Mechanical 7 "30" at 283.982,2367.8 h4.61; Mechanical 7 "25" at 293.93,2367.8 h4.61; Mechanical 7 "20" at 303.984,2367.8 h4.61; Mechanical 7 "15" at 314.416,2367.8 h4.61; Mechanical 7 "10" at 324.47,2367.8 h4.61; Mechanical 7 "5" at 334.778,2367.8 h4.61; Mechanical 7 "0" at 344.947,2367.8 h4.61; Mechanical 7 "50" at 349.7,2473.488 h4.61; Mechanical 7 "45" at 349.7,2463.488 h4.61; Mechanical 7 "40" at 349.7,2453.488 h4.61; Mechanical 7 "35" at 349.7,2443.488 h4.61; Mechanical 7 "30" at 349.7,2433.488 h4.61; Mechanical 7 "25" at 349.7,2423.488 h4.61; Mechanical 7 "20" at 349.7,2413.488 h4.61; Mechanical 7 "15" at 349.7,2403.488 h4.61; Mechanical 7 "10" at 349.7,2393.488 h4.61; Mechanical 7 "5" at 349.7,2383.488 h4.61; Mechanical 7 "0" at 349.7,2373.488 h4.61